# Altium PCB Copy of SensorBoard_PCB.PcbDoc (part 1 of 2)
Units mm, origin at the board's own origin, x right, y up, seen from the top; angles counter-clockwise.
Board outline 30.25 x 32.48 mm, 4 copper layers (Top Layer, GND, 3.3V, Bottom Layer), stack 0.603 mm thick; 41 components, 34 nets, 216 pads, 30 vias.
Unrouted connection lines stored in the file: 10.
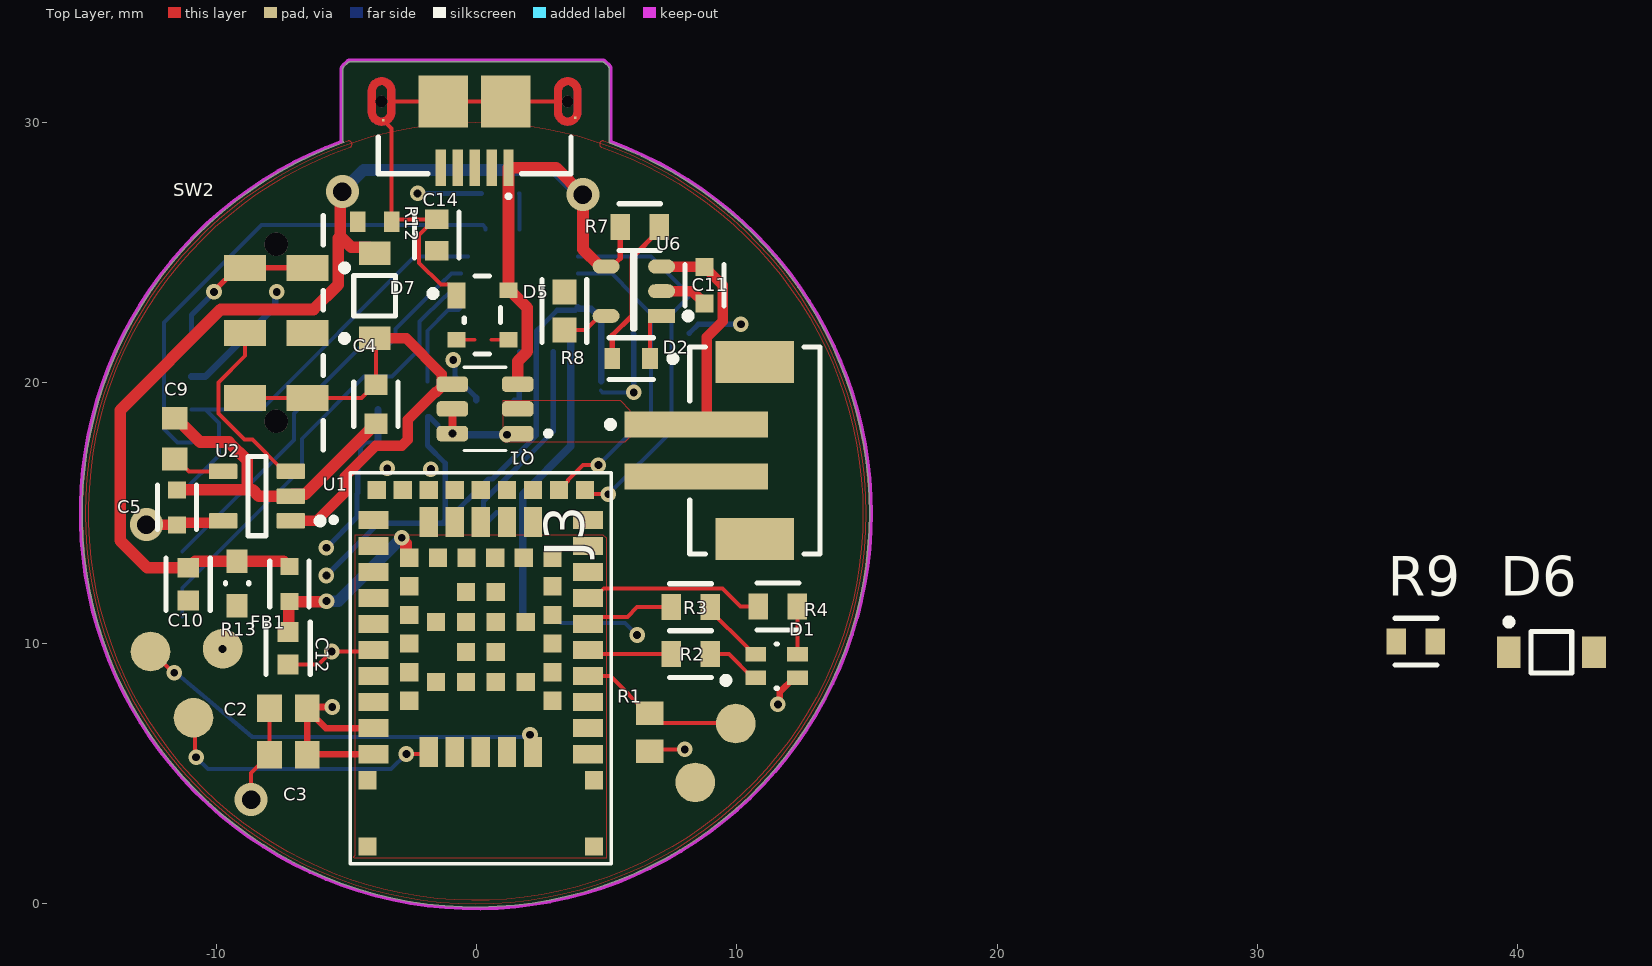
[diagram p0: Top Layer view]
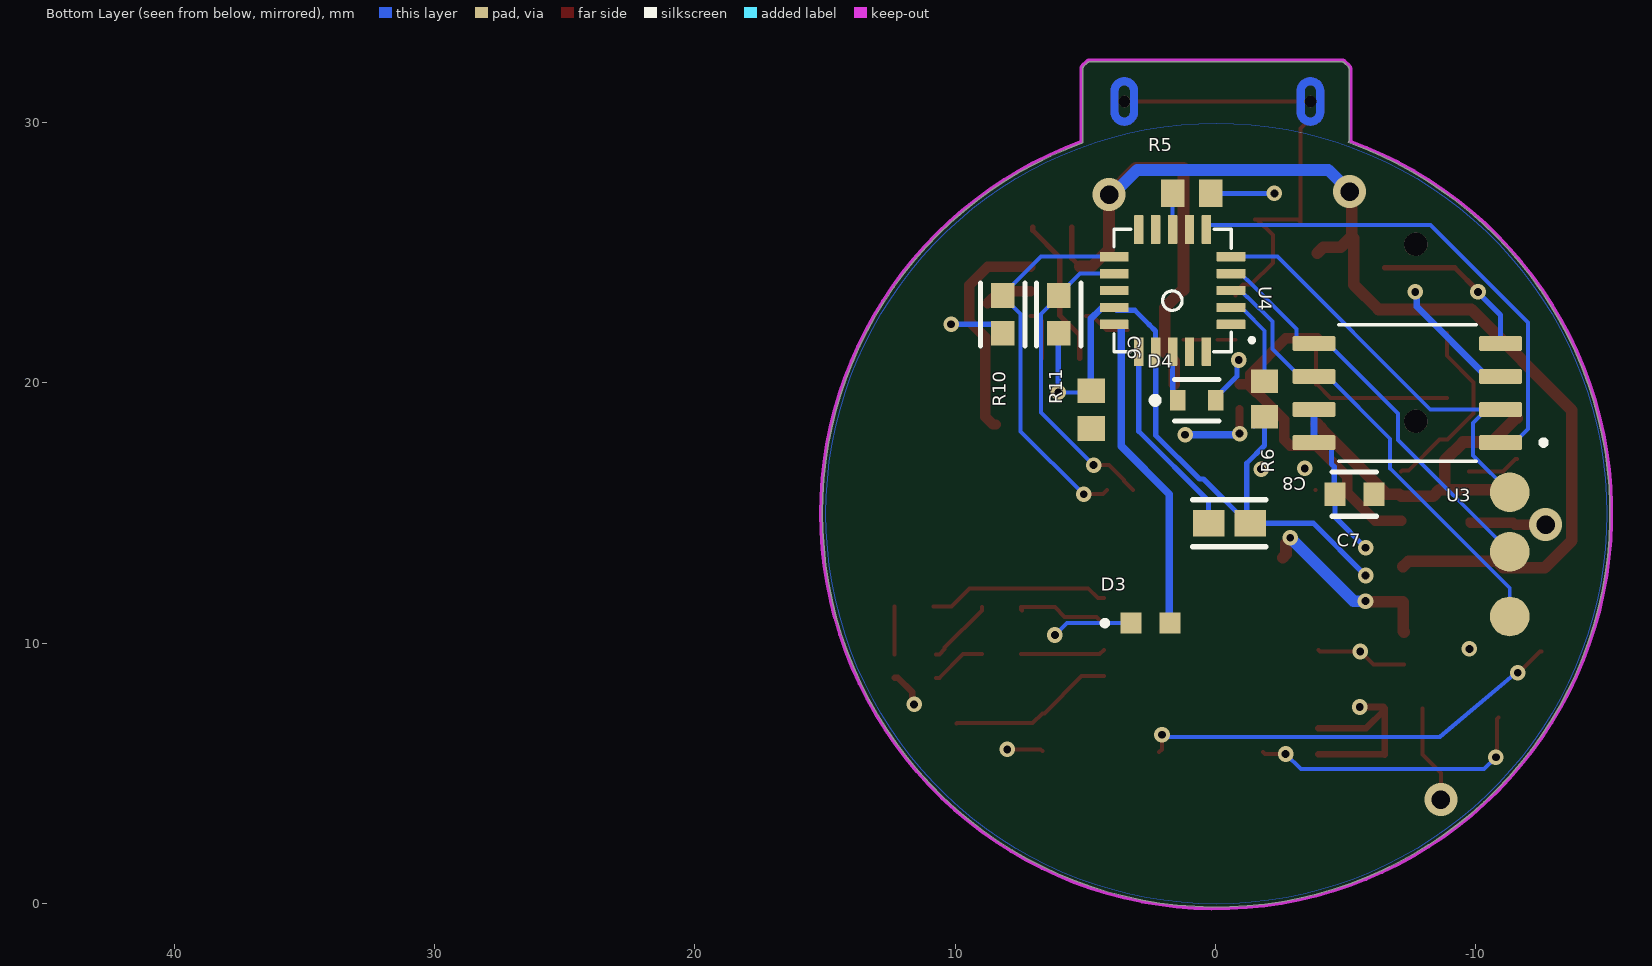
[diagram p1: Bottom Layer view, seen from below]
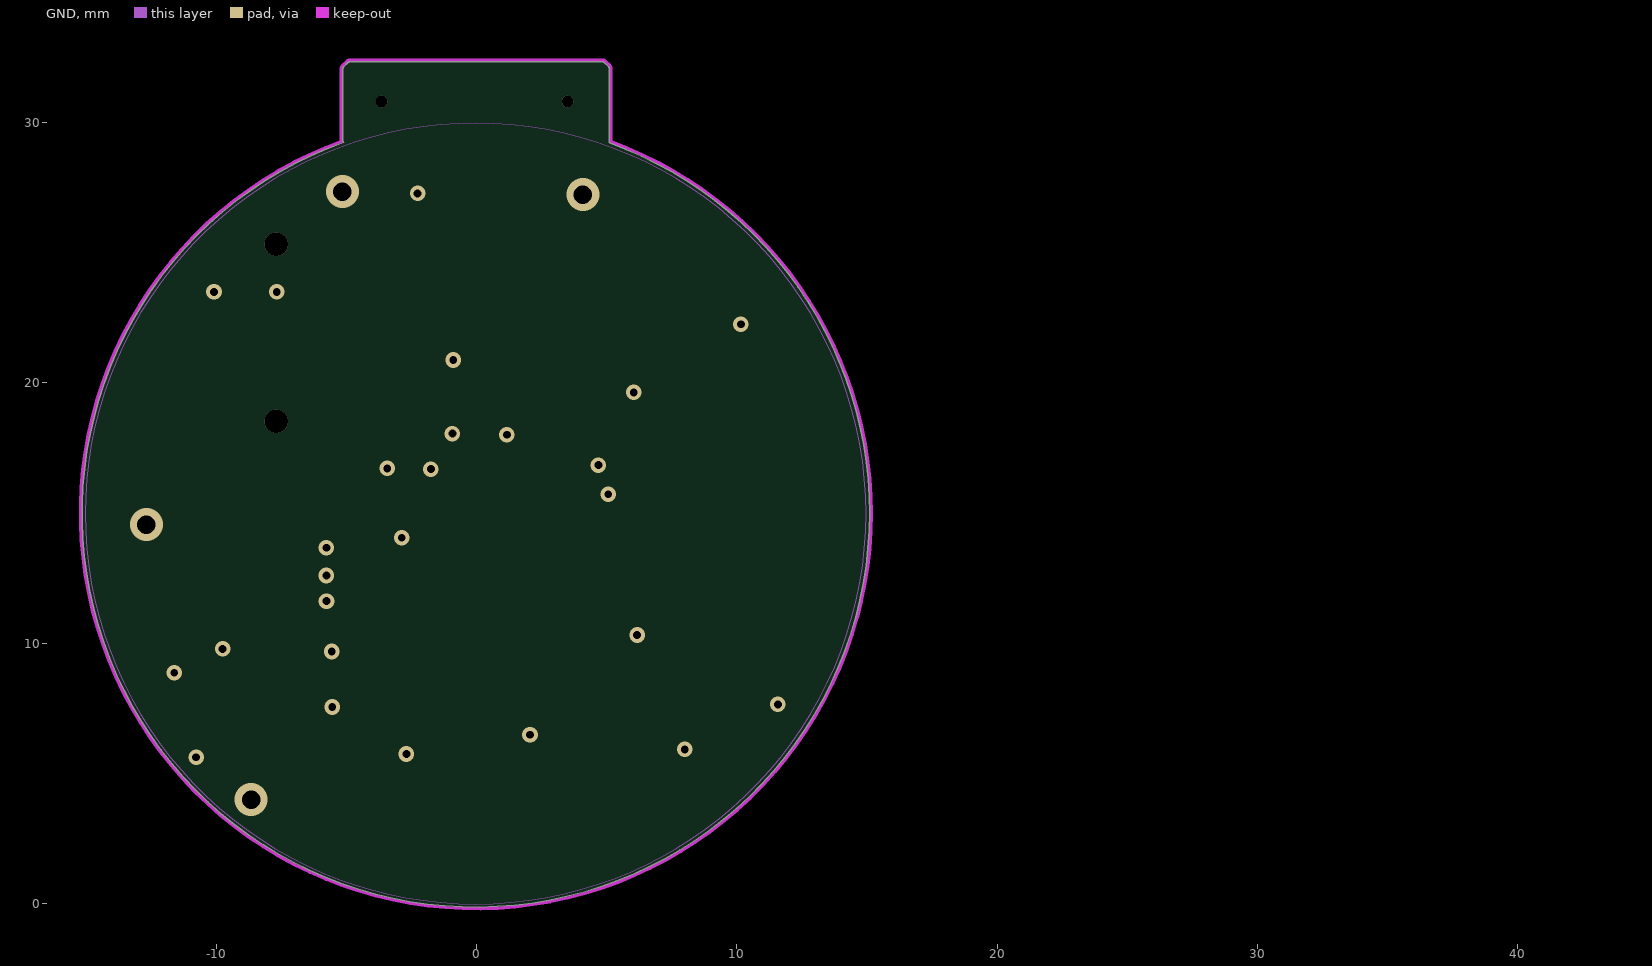
[diagram p2: GND]
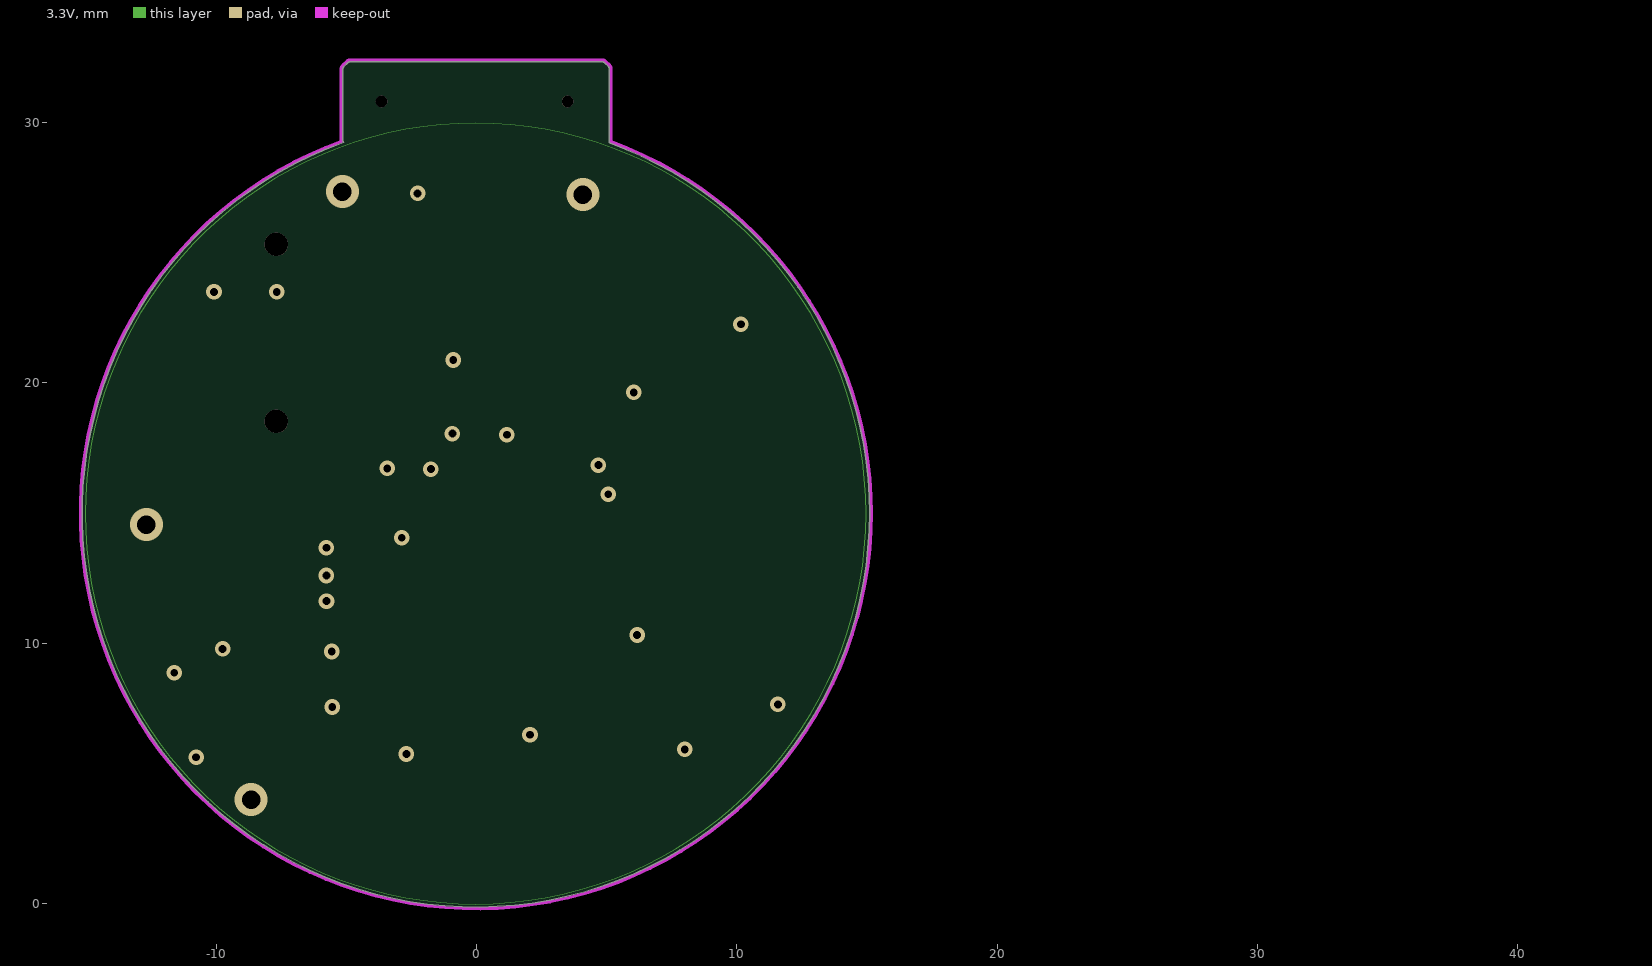
[diagram p3: 3.3V]

## Layer stack, top to bottom
Top Solder: solder mask 0.0102, Solder Resist, Dk 3.5
Top Layer: signal copper 0.0356
Dielectric 2: prepreg 0.0711, PP-006, Dk 4.1
GND: signal copper 0.035
Dielectric 1: dielectric 0.32, FR-4, Dk 4.8
3.3V: signal copper 0.035
Dielectric 3: prepreg 0.0711, PP-006, Dk 4.1
Bottom Layer: signal copper 0.0356
Bottom Solder: solder mask 0.0102, Solder Resist, Dk 3.5

## Board outline
-5.131,29.312 -5.131,32.058 cw(c-5.004,32.058) -5.093,32.149 -5.094,32.148 -4.945,32.297 -4.946,32.297 cw(c-4.855,32.207) -4.855,32.335 4.83,32.335 cw(c4.83,32.207) 4.92,32.297 5.068,32.148 5.068,32.149 cw(c4.978,32.058) 5.106,32.058 5.106,29.217 cw(c-0.025,14.986) 15.102,14.986 cw(c-0.025,14.986) -5.105,29.235 cw(c-5.004,29.312)

## Design rules (kind name [scope] priority, off if disabled: settings)
Clearance [All] p1: gap=0.15 ignorepadtopadclearanceinfootprint=FALSE except(0.28: Via-Via)
DiffPairsRouting [All] p1: maxlimit=0.254 minlimit=0.127 mostfreqgap=0.127 toplayer_minwidth=0.199 toplayer_maxwidth=0.199 toplayer_prefwidth=0.199 midlayer1_minwidth=0.199 midlayer1_maxwidth=0.199 midlayer1_prefwidth=0.199 midlayer2_minwidth=0.199 midlayer2_maxwidth=0.199 midlayer2_prefwidth=0.199 bottomlayer_minwidth=0.199 bottomlayer_maxwidth=0.199 bottomlayer_prefwidth=0.199 maxuncoupledlength=12.7
PolygonConnect [All] p1: connectstyle=Relief reliefconductorwidth=0.254 reliefentries=4 polygonreliefangle="90 Angle" airgapwidth=0.254
RoutingVias [All] p1: holewidth=0.3 width=1.27 viastyle="Through Hole" minholewidth=0.3 minwidth=0.6 maxholewidth=0.711 maxwidth=1.27
SolderMaskExpansion [All] p1: expansion=0.102 istentingtop=FALSE
Width [All] p1: maxlimit=0.6 minlimit=0.152 preferedwidth=0.152
29 further rules are at their usual default settings.

## Classes and differential pairs
differential pair USB: +USB_P -USB_N

## Components (designator, comment, footprint, x,y, rotation, side; value= is the part's Value field where it differs from the comment)
C2 "CL10B104KB8NNNC" SAMS-C0603-2_M -7.227,7.493 r0 top
C3 "CL10B104KB8NNNC" SAMS-C0603-2_M -7.227,5.715 r0 top
C4 "CC0603KRX7R7BB104" FP-CC0603-DA-MFG -3.861,19.177 r270 top value="100 nF"
C5 "GRM188R71A225KE15D" FP-GRM188-0_1-e0_2_0_5-MFG -11.506,15.215 r90 top
C6 "CL10B104KB8NNNC" SAMS-C0603-2_M 4.775,18.974 r270 bottom
C7 "CC0603KPX7R7BB105" FP-CC0603-DA-MFG -5.334,15.723 r180 bottom value="1 uF"
C8 "GRM188R60J106ME47D" FP-GRM188-0_1-e0_2_0_55-IPC_A -0.533,14.605 r180 bottom
C9 "C0603C103K3RACTU" RESC1608X55N -11.582,17.856 r270 top
C10 "GRM1885C1H102JA01D" FP-GRM188-0_1-e0_2_0_5-IPC_C -11.074,12.268 r270 top
C11 "C1608X5R0J106M080AB" FP-C1608-080-0_1-MFG 8.763,23.749 r90 top
C12 "GRM1885C1H102JA01D" FP-GRM188-0_1-e0_2_0_5-IPC_C -7.239,9.804 r270 top
C14 "C0603C472J5GACTU" FP-C0603C-CF-MFG -1.524,25.679 r270 top value="4,700 pF"
D1 "EAST1616RGBB2" FP-EAST1616RGBB2-MFG 11.532,9.119 r0 top
D2 "TLMO1000-GS08" FP-6_541-5056_01-4-MFG 5.944,20.93 r180 top
D3 "SIR19-21C/TR8" SIR19-21C/TR8 2.503,10.77 r180 bottom
D4 "TLMO1000-GS08" FP-6_541-5056_01-4-MFG 0.723,19.329 r180 bottom
D5 "PRTR5V0U2X,215" FP-SOT143B-MFG 0.229,22.606 r0 top
D6 "MBR0540T1G" ONSC-SOD-123-2-425-04_V 41.3,9.652 r0 top
D7 "MBR0540T1G" ONSC-SOD-123-2-425-04_V -3.912,23.343 r90 top
FB1 "BLM18EG101TN1D" FP-BLM18-0_15-t0_5-MFG -7.188,12.268 r270 top
J3 "B2B-PH-SM4-TB(LF)(SN)" JST-B2B-PH-SM4-TB-2_V 10.693,17.399 r90 top
Q1 "TSM3443CX6RFG" SOT95P280X145-6N 0.33,18.999 r180 top
R1 "ERJ-3EKF3242V" RESC1608X55X30ML15T15 6.655,6.579 r270 top
R2 "CRCW0603330RFKEA" FP-CRCW0603-e3-MFG 8.23,9.576 r180 top
R3 "CRCW0603330RFKEA" FP-CRCW0603-e3-MFG 8.23,11.379 r180 top
R4 "CRCW0603330RFKEA" FP-CRCW0603-e3-MFG 11.582,11.405 r180 top
R5 "ERJ-3EKF3242V" RESC1608X55X30ML15T15 0.914,27.28 r180 bottom
R6 "CRCW060310K0FKTB" RESC1609X50X30ML10T20 -1.88,19.38 r90 bottom
R7 "CRCW06031K00FKEA" FP-CRCW0603-e3-MFG 6.274,25.984 r180 top
R8 "CR0603-FX-4701ELF" FP-CR0603-IPC_B 3.378,22.758 r270 top
R9 "CRCW06030000Z0EAHP" FP-CRCW0603-HPe3-MFG 36.093,10.058 r0 top
R10 "CR0603-FX-4701ELF" FP-CR0603-IPC_B 8.179,22.631 r270 bottom
R11 "CR0603-FX-4701ELF" FP-CR0603-IPC_B 6.02,22.631 r270 bottom
R12 "RC0603FR-071ML" RESC1608X55X25LL10T15 -3.912,26.187 r0 top
R13 "RC0603FR-07100KL" FP-RC0603-0_55-MFG -9.195,12.294 r90 top
SW2 "JS102011JAQN" FP-JS102011JAQN-MFG -7.69,21.92 r270 top
U1 "NINA-B306-00B-00" XCVR_NINA-B306-00B-00 0.169,9.034 r0 top
U2 "TPS73033DBVR" FP-DBV0005A-MFG -8.433,15.646 r180 top
U3 "AT25SF041B-SHB-T" SOIC127P790X216-8N -7.366,19.609 r0 bottom
U4 "AS7263-BLGT" AS7263Footprint 1.651,23.546 r0 bottom
U6 "MCP73831T-2ATI/OT" FP-C04-091-OT-IPC_C 6.045,23.52 r180 top

## Footprints (in the part's own frame and the unit in brackets; to place one, negate y for a bottom-side part, rotate by r counter-clockwise, add the part's x,y. Pads: shape width x height; smd on the part's side, far side on the other; paste and mask are expansions set on the pad)
AS7263Footprint [mm]
  rrect9% 1.1x0.36 smd: 1(-2.245,1.3) 2(-2.245,0.65) 3(-2.245,0) 4(-2.245,-0.65) 5(-2.245,-1.3) 11(2.245,-1.3) 12(2.245,-0.65) 13(2.245,0) 14(2.245,0.65) 15(2.245,1.3)
  rrect9% 0.36x1.1 smd: 6(-1.3,-2.345) 7(-0.65,-2.345) 8(0,-2.345) 9(0.65,-2.345) 10(1.3,-2.345) 16(1.3,2.345) 17(0.65,2.345) 18(0,2.345) 19(-0.65,2.345) 20(-1.3,2.345)
  silkscreen extent -3.12,-2.35 2.25,2.35
FP-6_541-5056_01-4-MFG [mm]
  rect 0.6x0.8 smd paste+0 mask+0: 1(-0.725,0) 2(0.725,0)
  silkscreen extent -1.73,-0.8 0.85,0.8, body extent -1.12,-0.55 1.12,0.55, height 0.25
FP-BLM18-0_15-t0_5-MFG [mm]
  rect 0.65x0.7 smd paste+0 mask+0: 1(-0.675,0) 2(0.675,0)
  silkscreen extent -0.87,-0.75 0.87,0.75, body extent -1.1,-0.58 1.1,0.58, height 0.25
FP-C04-091-OT-IPC_C [mm]
  rect 1.038x0.538 smd paste+0 mask+0: 1(-1.066,0.95)
  rrect100% 1.038x0.538 smd paste+0 mask+0: 2(-1.066,0) 3(-1.066,-0.95) 4(1.066,-0.95) 5(1.066,0.95)
  silkscreen extent -2.21,-1.45 0.05,1.45
FP-C0603C-CF-MFG [mm]
  rect 0.75x0.9 smd paste+0 mask+0: 1(-0.6,0) 2(0.6,0)
  silkscreen extent -0.87,-0.85 0.88,0.85, body extent -1.2,-0.6 1.2,0.6, height 0.25
FP-C1608-080-0_1-MFG [mm]
  rect 0.7x0.7 smd paste+0 mask+0: 1(-0.7,0) 2(0.7,0)
  silkscreen extent -0.8,-0.75 0.8,0.75, body extent -1.15,-0.55 1.15,0.55, height 0.25
FP-CC0603-DA-MFG [mm]
  rect 0.8x0.9 smd paste+0 mask+0: 1(-0.75,0) 2(0.75,0)
  silkscreen extent -0.85,-0.85 0.85,0.85, body extent -1.35,-0.75 1.35,0.75, height 0.25
FP-CR0603-IPC_B [mm]
  rect 0.958x0.912 smd paste+0 mask+0: 1(-0.727,0) 2(0.727,0)
  silkscreen extent -1.21,-0.86 1.21,0.86, body extent -1.46,-0.71 1.46,0.71, height 0.25
FP-CRCW0603-e3-MFG [mm]
  rect 0.75x1 smd paste+0 mask+0: 1(-0.75,0) 2(0.75,0)
  silkscreen extent -0.8,-0.9 0.8,0.9, body extent -0.77,-0.42 0.77,0.43, height 0.5
FP-CRCW0603-HPe3-MFG [mm]
  rect 0.75x1 smd paste+0 mask+0: 1(-0.75,0) 2(0.75,0)
  silkscreen extent -0.8,-0.9 0.8,0.9, body extent -1.22,-0.6 1.22,0.6, height 0.25
FP-DBV0005A-MFG [mm]
  rrect17% 1.1x0.6 smd paste+0 mask+0: 1(-1.3,0.95) 2(-1.3,0) 3(-1.3,-0.95) 4(1.3,-0.95) 5(1.3,0.95)
  silkscreen extent -2.55,-1.53 0.35,1.53, body extent -1.95,-1.78 1.95,1.78, height 0.25
FP-EAST1616RGBB2-MFG [mm]
  rect 0.8x0.55 smd paste+0 mask+0: 1(-0.8,-0.45) 2(-0.8,0.45) 3(0.8,0.45) 4(0.8,-0.45)
  silkscreen extent -2.07,-0.85 0.03,0.85, body extent -1.3,-0.95 1.3,0.95, height 0.25
FP-GRM188-0_1-e0_2_0_5-IPC_C [mm]
  rect 0.759x0.812 smd paste+0 mask+0: 1(-0.627,0) 2(0.627,0)
  silkscreen extent -1.01,-0.85 1.01,0.85, body extent -1.11,-0.55 1.11,0.55, height 0.25
FP-GRM188-0_1-e0_2_0_5-MFG [mm]
  rect 0.65x0.7 smd paste+0 mask+0: 1(-0.675,0) 2(0.675,0)
  silkscreen extent -0.85,-0.75 0.85,0.75, body extent -1.1,-0.55 1.1,0.55, height 0.25
FP-GRM188-0_1-e0_2_0_55-IPC_A [mm]
  rect 1.208x1.012 smd paste+0 mask+0: 1(-0.802,0) 2(0.802,0)
  silkscreen extent -1.41,-0.91 1.41,0.91, body extent -0.8,-0.4 0.8,0.4, height 0.9
FP-JS102011JAQN-MFG [mm]
  rect 1x1.6 smd paste+0 mask+0: 1(-2.5,1.2) 1(-2.5,-1.2) 2(0,1.2) 2(0,-1.2) 3(2.5,1.2) 3(2.5,-1.2)
  round 0.9 hole 0.9 unplated paste-1000 mask+0: ""(-3.4,0) ""(3.4,0)
  silkscreen extent -4.5,1.8 4.5,2.75, body extent -4.6,-3.9 4.6,2.1, height 0.25
FP-RC0603-0_55-MFG [mm]
  rect 0.9x0.8 smd paste+0 mask+0: 1(-0.85,0) 2(0.85,0)
  silkscreen extent -0.03,-0.45 0.03,0.45, body extent -1.4,-0.55 1.4,0.55, height 0.25
FP-SOT143B-MFG [mm]
  rect 0.7x1 smd paste-1000 mask+0: 1(-1,0.75)
  rect 0.7x0.6 smd paste-1000 mask+0: 2(-1,-0.95) 3(1,-0.95) 4(1,0.95)
  silkscreen extent -2.02,-1.5 0.7,1.5, body extent -1.5,-1.63 1.5,1.63, height 0.25
JST-B2B-PH-SM4-TB-2_V [mm] "SMD, 2-Leads, Body 7.95x5mm, Pitch 2mm"
  rect 1x5.5 smd: 1(1,2.25) 2(-1,2.25)
  rect 1.6x3 smd: MP1(3.4,0) MP2(-3.4,0)
  silkscreen extent -3.98,-2.5 3.98,5.67, body extent -3.97,-2.5 3.97,4.5, height 6.6
ONSC-SOD-123-2-425-04_V [mm] "SOD, 2-Leads, Body 2.69x1.6mm"
  rect 0.91x1.22 smd: 1(-1.635,0) 2(1.635,0)
  silkscreen extent -1.76,-0.8 0.78,1.28, body extent -1.35,-0.8 1.35,0.8, height 1.35
RESC1608X55N [mm]
  rect 0.87x0.98 smd: 1(-0.78,0) 2(0.78,0)
RESC1608X55X25LL10T15 [mm] "Chip Resistor, 2-Leads, Body 1.70x0.90mm, IPC High Density"
  rect 0.6x0.8 smd: 1(-0.65,0) 2(0.65,0)
  body extent -0.85,-0.45 0.85,0.45, height 0.55
RESC1608X55X30ML15T15 [mm] "Chip Resistor, 2-Leads, Body 1.60x0.80mm, IPC Low Density"
  rect 0.9x1.05 smd: 1(-0.725,0) 2(0.725,0)
  body extent -0.87,-0.48 0.87,0.48, height 0.55
RESC1609X50X30ML10T20 [mm] "Chip Resistor, 2-Leads, Body 1.55x0.85mm, IPC Low Density"
  rect 0.9x1.05 smd: 1(-0.675,0) 2(0.675,0)
  body extent -0.82,-0.48 0.82,0.48, height 0.5
SAMS-C0603-2_M [mm] "Chip Capacitor, 2-Leads, Body 1.70x0.90mm, IPC Low Density"
  rect 0.95x1.05 smd: 1(-0.725,0) 2(0.725,0)
  body extent -0.85,-0.45 0.85,0.45, height 0.9
SIR19-21C/TR8 [mm]
  rect 0.8x0.8 smd: 1(-0.75,0) 2(0.75,0)
  silkscreen extent -1.85,-0.1 -1.65,0.1
SOIC127P790X216-8N [mm]
  rrect25% 1.65x0.58 smd: 1(-3.585,1.905) 2(-3.585,0.635) 3(-3.585,-0.635) 4(-3.585,-1.905) 5(3.585,-1.905) 6(3.585,-0.635) 7(3.585,0.635) 8(3.585,1.905)
  silkscreen extent -5.33,-2.62 2.65,2.62, body extent -3.99,-2.62 3.99,2.62, height 2.16
SOT95P280X145-6N [mm]
  rrect50% 1.21x0.59 smd: 1(-1.255,0.95) 2(-1.255,0) 3(-1.255,-0.95) 4(1.255,-0.95) 5(1.255,0) 6(1.255,0.95)
  silkscreen extent -2.53,-1.6 0.8,1.6, body extent -1.4,-1.46 1.4,1.46, height 1.5
XCVR_NINA-B306-00B-00 [mm]
  rect 1.15x0.7 smd: 1(-4.125,5.7) 2(-4.125,4.7) 3(-4.125,3.7) 4(-4.125,2.7) 5(-4.125,1.7) 6(-4.125,0.7) 7(-4.125,-0.3) 8(-4.125,-1.3) 9(-4.125,-2.3) 10(-4.125,-3.3) 16(4.125,-3.3) 17(4.125,-2.3) 18(4.125,-1.3) 19(4.125,-0.3) 20(4.125,0.7) 21(4.125,1.7) 22(4.125,2.7) 23(4.125,3.7) 24(4.125,4.7) 25(4.125,5.7)
  rect 0.7x1.15 smd: 11(-2,-3.225) 12(-1,-3.225) 13(0,-3.225) 14(1,-3.225) 15(2,-3.225) 26(2,5.625) 27(1,5.625) 28(0,5.625) 29(-1,5.625) 30(-2,5.625)
  rect 0.7x0.7 smd: 31(-2.75,4.25) 32(-2.75,3.15) 33(-2.75,2.05) 34(-2.75,0.95) 35(-2.75,-0.15) 36(-2.75,-1.25) 37(2.75,-1.25) 38(2.75,-0.15) 39(2.75,0.95) 40(2.75,2.05) 41(2.75,3.15) 42(2.75,4.25) 43(1.65,4.25) 44(0.55,4.25) 45(-0.55,4.25) 46(-1.65,4.25) 47(4,6.85) 48(3,6.85) 49(2,6.85) 50(1,6.85) 51(0,6.85) 52(-1,6.85) 53(-2,6.85) 54(-3,6.85) 55(-4,6.85) EAGP1(-4.35,-4.3) EAGP2(4.35,-4.3) EAGP3(-4.35,-6.85) EAGP4(4.35,-6.85) EGP1(-0.575,2.925) EGP2(0.575,2.925) EGP3(-1.725,1.775) EGP4(-0.575,1.775) EGP5(0.575,1.775) EGP6(1.725,1.775) EGP7(-0.575,0.625) EGP8(0.575,0.625) EGP9(-1.725,-0.525) EGP10(-0.575,-0.525) EGP11(0.575,-0.525) EGP12(1.725,-0.525)
  silkscreen extent -5.75,-7.51 5.01,7.51, body extent -5,-7.5 5,7.5, height 2.63

## Part data
C2 C3 C6: library part CMP-2000-05332-1, "Multi-layer Ceramic Capacitor, -55 to 125 degC, 2-Pin SMD (0603), RoHS, Tape and Reel", Capacitance=0.1µF, Case Size/Dimension=0603, Dielectric=X7R, Manufacturer="Samsung Electro-Mechanics", Rated Voltage=50V, Tolerance (%)=±10%, Datasheet URL=https://datasheet.ciiva.com/29198/456651-da-01-en-vs-kondensator-0605-29198839.pdf, Datasheet Version=Nov-10, Manufacturer URL=http://www.samsungsem.com/global/index.jsp
C4: library part CMP-2000-05002-2, "CAP CER 0.1UF 16V X7R 0603", Capacitance="100 nF", Manufacturer=YAGEO, Package=CC0603-DA, Temperature="-55°C to +125°C", Temperature Characteristic=X7R, Temperature Coefficient=15%, Temperature Range High=+125°C, Temperature Range Low=-55°C, Tolerance=0.1, Voltage="16 V", Automotive=No, Category=Cap, ComponentLink2Description=Datasheet, ComponentLink2URL=http://www.yageo.com/documents/recent/UPY-GPHC_X7R_6.3V-to-50V_18.pdf, Device Class L1="Passive Components", Device Class L2=Capacitors, Device Class L3="Ceramic Capacitors", Digikey Description="CAP CER 0.1UF 16V X7R 0603", Footprint Url=http://www.yageo.com/exep/pages/download/literatures/UPY-C_GEN_24.pdf, Height=0.9mm, Lead Free=Yes, Manufacturer Part Number=CC0603KRX7R7BB104, Material=Ceramic, Mouser Description="Multilayer Ceramic Capacitor, CC Series, 0.1 - F, - 10%, X7R, 16 V, 0603 [1608 Metric]", Octopart=https://octopart.com/cc0603krx7r7bb104-yageo-192941, RoHS=TRUE, Voltage Rating="16 V"
C5: library part CMP-2006-02836-2, "Chip Multilayer Ceramic Capacitors for General Purpose, 0603, 2.2uF, X7R, 15%, 10%, 10V", Capacitance=2.2uF, Case Code (Imperial)=0603, Case Code (Metric)=1608, Dielectric=X7R, Max Operating Temperature=125°C, Min Operating Temperature=-55°C, Package Quantity=1, Tolerance=10%, Voltage=10V, Case/Package=0603, Depth=0.8mm, Height=0.8mm, Lead Free="Lead Free", Length=1.6mm, Material=Ceramic, Mount="Surface Mount", Number of Pins=2, Packaging="Cut Tape", REACH SVHC="No SVHC", Termination=SMD/SMT, Thickness=0.035inch, Voltage Rating=10V, Voltage Rating (DC)=10V, Weight=7.1E-05oz, Width=0.031inch
C7: library part CMP-03422-001047-1, "CC0603 1 uF X7R 10.00% 16 V", Capacitance="1 uF", Manufacturer=YAGEO, Package=CC0603-DA, Temperature="-55°C to +125°C", Temperature Characteristic=X7R, Temperature Coefficient=15%, Temperature Range High=+125°C, Temperature Range Low=-55°C, Tolerance=0.1, Voltage="16 V", Automotive=No, Category=Cap, ComponentLink2Description=Datasheet, ComponentLink2URL=http://www.yageo.com/documents/recent/UPY-GPHC_X7R_6.3V-to-50V_18.pdf, Device Class L1="Passive Components", Device Class L2=Capacitors, Device Class L3="Ceramic Capacitors", Footprint Url=http://www.yageo.com/exep/pages/download/literatures/UPY-C_GEN_24.pdf, Height=0.9mm, Lead Free=Yes, Manufacturer Part Number=CC0603KPX7R7BB105, Material=Ceramic, Mouser Description="Cap Ceramic 1uF 16V X7R 10% SMD 0603 125°C Paper T/R", Octopart=https://octopart.com/cc0603kpx7r7bb105-yageo-25629533, RoHS=TRUE, Voltage Rating="16 V"
C8: library part CMP-2006-02792-2, "Chip Multilayer Ceramic Capacitors for General Purpose, 0603, 10uF, X5R, 15%, 20%, 6.3V", Capacitance=10uF, Case Code (Imperial)=0603, Case Code (Metric)=1608, Dielectric=X5R, Max Operating Temperature=85°C, Min Operating Temperature=-55°C, Package Quantity=4000, Tolerance=20%, Voltage=6.3V, Case/Package=0603, Depth=0.8mm, Height=0.8mm, Lead Free="Lead Free", Length=1.6mm, Material=Ceramic, Mount="Surface Mount", Packaging="Tape and Reel", Radiation Hardening=No, REACH SVHC="No SVHC", Termination=SMD/SMT, Thickness=0.035inch, Voltage Rating=6.3V, Voltage Rating (DC)=6.3V, Width=0.031inch
C9: Capacitance=0.01uF, Supplier Part Number 1=399-C0603C103K3RAC7867CT-ND, Supplier 1=Digi-Key
C10 C12: library part CMP-1662-00022-2, "Chip Multilayer Ceramic Capacitors for General Purpose, 0603, 1000pF, C0G, 30ppm/°C, 5%, 50V", Capacitance=1nF, Case Code (Imperial)=0603, Case Code (Metric)=1608, Dielectric=C0G, Dielectric Material=Ceramic, Insulation Resistance=10GR, Max Operating Temperature=125°C, Min Operating Temperature=-55°C, Package Quantity=1, Temperature Coefficient=30ppm/°C, Tolerance=5%, Voltage=50V, Case/Package=0603, Depth=0.8mm, Height=0.8mm, Lead Free="Lead Free", Length=1.6mm, Material=Ceramic, Mount="Surface Mount", Number of Pins=2, Packaging="Tape and Reel", Radiation Hardening=No, REACH SVHC="No SVHC", Termination=SMD/SMT, Thickness=0.035inch, Voltage Rating=50V, Voltage Rating (DC)=50V, Width=0.8mm
C11: library part CMP-2000-04978-2, "Multilayer Ceramic Capacitors 10μF ±20% 6.3V X5R SMD 0603", Capacitance=10uF, Case Code (Imperial)=0603, Case Code (Metric)=1608, Dielectric=X5R, Dielectric Material=Ceramic, Max Operating Temperature=85°C, Min Operating Temperature=-55°C, Package Quantity=1, Tolerance=20%, Voltage=6.3V, Case/Package=0603, Construction=Flat, Depth=0.8mm, Height=0.8mm, Lead Free="Lead Free", Length=1.6mm, Mount="Surface Mount", Packaging="Tape and Reel", Radiation Hardening=No, REACH SVHC="No SVHC", Resistor Type=Ceramic, RoHS Compliant=Yes, Series=C, Termination=SMD/SMT, Thickness=0.035inch, Voltage Rating=6.3V, Voltage Rating (DC)=6.3V, Weight=7.1E-05oz, Width=0.031inch
C14: library part CMP-2006-03333-2, "CAP CER 4700PF 50V 5% NP0 0603", Capacitance="4,700 pF", Manufacturer=KEMET, Package=C0603C-CF, Temperature="-55°C to +125°C", Temperature Characteristic=C0G, Temperature Coefficient=30ppm/°C, Temperature Range High=+125°C, Temperature Range Low=-55°C, Tolerance=0.05, Voltage Rating="50 V", Automotive=Yes, Automotive Grade="Grade 1", Category=Cap, ComponentLink2Description=Datasheet, ComponentLink2URL=https://api.kemet.com/component-edge/download/datasheet/C0603C100J5GACAUTO.pdf, Device Class L1="Passive Components", Device Class L2=Capacitors, Device Class L3="Ceramic Capacitors", Digikey Description="CAP CER 4700PF 50V 5% NP0 0603", Height=0.87mm, Lead Free=Yes, Manufacturer Part Number=C0603C472J5GACTU, Material=Ceramic, Mouser Description="Multilayer Ceramic Capacitors MLCC - SMD/SMT 50volts 4700pF 5% C0G", Octopart=https://octopart.com/c0603c472j5gactu-kemet-9145067, RoHS=TRUE
D1: library part CMP-51564-000002-1, "LED RGB DIFFUSED 4SMD", Colour="Blue, Green, Red", Forward Current=5mA, Forward Voltage=3/3/2.1V, Manufacturer=Everlight, Package=0, Power Dissipation=95/95/60mW, Reverse Voltage=5V, Temperature="-40°C to +85°C", Temperature Range High=+85°C, Temperature Range Low=-40°C, Automotive=No, Category=Diode, ComponentLink2Description=Datasheet, ComponentLink2URL=https://everlightamericas.com/index.php?controller=attachment&id_attachment=2426, Device Class L1=Optoelectronics, Device Class L2=LEDs, Device Class L3=unset, Digikey Description="LED RGB DIFFUSED 4SMD", Height=0.45mm, Lead Free=Yes, Led Orientation="Top View", Luminous Intensity=36/140/45mcd, Manufacturer Part Number=EAST1616RGBB2, Octopart=https://octopart.com/east1616rgbb2-everlight-80328051, Peak Emmision Wavelength=468/518/632nm, RoHS=TRUE, Viewing Angle=120°, Wavelength=475/535/628nm
D2 D4: library part CMP-02520-000010-1, "LED ORANGE 0603 SMD", Ambient Temperature Range High=+100°C, Ambient Temperature Range Low=-40°C, Colour=Orange, Forward Current=2mA, Forward Voltage=1.8V, Manufacturer=Vishay, Max Junction Temp=+120°C, Package=6.541-5056.01-4, Power Dissipation=40mW, Reverse Voltage=6V, Temperature="-40°C to +100°C", Automotive=Yes, Automotive Grade="Grade 2", Category=Diode, ComponentLink2Description=Datasheet, ComponentLink2URL=http://www.vishay.com/docs/83172/tlmo1000.pdf, Device Class L1=Optoelectronics, Device Class L2=LEDs, Device Class L3=unset, Digikey Description="LED ORANGE 0603 SMD", Height=0.65mm, Lead Free=Yes, Led Orientation="Top View", Luminous Intensity=7.5mcd, Manufacturer Part Number=TLMO1000-GS08, Octopart=https://octopart.com/tlmo1000-gs08-vishay-41955669, Peak Emmision Wavelength=610nm, RoHS=TRUE, Temperature Range High=+100°C, Temperature Range Low=-40°C, Viewing Angle=160°, Wavelength=605nm
D5: library part CMP-14436-000007-1, "TVS DIODE 5.5V SOT143B"
D6 D7: library part CMP-1055-00401-1, "Schottky Power Rectifier, 2-Pin SOD-123, Pb-Free, Tape and Reel", Manufacturer="On Semiconductor", ComponentLink1Description="Manufacturer URL", ComponentLink1URL=http://www.onsemi.com/, ComponentLink2Description=Datasheet, ComponentLink2URL=http://www.onsemi.cn/pub_link/Collateral/MBR0540T1-D.PDF, ComponentLink3Description="Package Specification", ComponentLink3URL=http://www.onsemi.com/pub_link/Collateral/425-04.PDF, Configuration=Single, DatasheetVersion="Rev. 7", IFSM Max (A)=5.5, Mounting Technology="Surface Mount", PackageDescription="2-Pin SOD, Body 1.6 x 2.69 mm", PackageReference=SOD-123-2-425-04, PackageVersion="Rev. G, 10/2009", Packing="Tape and Reel", PartNumber=MBR0540T1G, RoHS=TRUE
FB1: library part CMP-0686-00530-3, "Chip Ferrite Bead, 0603, 100Ω @ 100MHz, 25%, 0.045Ω, 2A", Case Code (Imperial)=0603, Case Code (Metric)=1608, Current Rating=2A, DC Resistance (DCR)=45mR, Max Operating Temperature=125°C, Min Operating Temperature=-55°C, Package Quantity=1, Test Frequency=100MHz, Tolerance=25%, Case/Package=0603, Contact Plating=Tin, Core Material=Ferrite, Depth=0.8mm, Height=0.8mm, Impedance=100R, Lead Free="Lead Free", Length=1.6mm, Material=Ferrite, Max Current Rating=2A, Max DC Current=2A, Number of Circuits=1, Number of Lines=1, Number of Pins=2, Packaging="Tape and Reel", REACH SVHC="No SVHC", Termination=SMD/SMT, Width=0.8mm
J3: library part CMP-2000-05163-1, "Male Header, Pitch 2 mm, 1 x 2 Position, Height 6.6 mm, RoHS, Tape and Reel", Manufacturer=JST, Datasheet URL=https://ciiva.com/datasheet-click-26894756?src=ciiva&sig=90099765, Datasheet Version=Dec-12, Manufacturer URL=http://www.jst.com/home2.html, No of Positions=2, Pitch=2mm, Style/Orientation=StraightHeader/Plug, Termination=Crimp, Type=ShroudedHeader
Q1: Supplier Part Number 1=TSM3443CX6RFGCT-ND, Supplier 1=Digi-Key
R1 R5: library part CMP-2000-00433-1, Manufacturer=Panasonic, Part Number=ERJ-3EKF3242V
R2 R3 R4: library part CMP-1012-00454-3, "RES Thick Film, 330Ω, 1%, 0.1W, 100ppm/°C, 0603", Case Code (Imperial)=0603, Case Code (Metric)=1608, Max Operating Temperature=155°C, Max Power Dissipation=100mW, Min Operating Temperature=-55°C, Package Quantity=10, Resistance=330R, Temperature Coefficient=100ppm/°C, Tolerance=1%, Voltage Rating=75V, Case/Package=0603, Composition="Thick Film", Contact Plating=Tin, Depth=0.85mm, Features="Automotive AEC-Q200", Height=0.45mm, Lead Free="Lead Free", Length=1.55mm, Military Standard=Not, Mount="Surface Mount", Number of Terminations=2, Packaging="Tape and Reel", Power Rating=100mW, Radiation Hardening=No, Termination=SMD/SMT, Voltage Rating (DC)=75V, Weight=7.1E-05oz, Width=0.033inch
R6: library part CMP-2000-03837-1, Manufacturer="Vishay Dale", Part Number=CRCW060310K0FKTB
R7: library part CMP-1666-00003-5, "RES Thick Film, 1kΩ, 1%, 0.1W, 100ppm/°C, 0603", Case Code (Imperial)=0603, Case Code (Metric)=1608, Max Operating Temperature=155°C, Max Power Dissipation=100mW, Min Operating Temperature=-55°C, Package Quantity=10, Resistance=1kR, Temperature Coefficient=100ppm/°C, Tolerance=1%, Voltage Rating=75V, Case/Package=0603, Composition="Thick Film", Contact Plating=Tin, Depth=0.85mm, Features="Automotive AEC-Q200", Height=0.45mm, Lead Free="Lead Free", Length=1.55mm, Military Standard=Not, Mount="Surface Mount", Number of Pins=2, Number of Terminations=2, Packaging="Tape and Reel", Power Rating=100mW, Radiation Hardening=No, Termination=SMD/SMT, Voltage Rating (DC)=75V, Weight=7.1E-05oz, Width=0.033inch
R8 R10 R11: library part CMP-07231-003020-1, "Thick Film Chip Resistors 0603 4.7kΩ 0.1W 1% 100ppm/°C", Case Code (Imperial)=0603, Case Code (Metric)=1608, Max Operating Temperature=155°C, Max Power Dissipation=100mW, Min Operating Temperature=-55°C, Package Quantity=1, Resistance=4.7kR, Temperature Coefficient=100ppm/°C, Tolerance=1%, Voltage Rating=50V, Case/Package=0603, Composition="Thick Film", Contact Plating=Tin, Depth=0.8mm, Features="Moisture Resistant", Height=0.45mm, Length=1.6mm, Mount="Surface Mount", Number of Pins=2, Number of Terminations=2, Packaging="Tape and Reel", Power Rating=100mW, Radiation Hardening=No, REACH SVHC="No SVHC", Termination=SMD/SMT, Thickness=457um, Voltage Rating (DC)=50V, Width=0.8mm
R9: library part CMP-2000-03817-2, "RES Thick Film, 0Ω, , 0.33W, , 0603", Case Code (Imperial)=0603, Case Code (Metric)=1608, Max Operating Temperature=155°C, Max Power Dissipation=250mW, Min Operating Temperature=-55°C, Package Quantity=5000, Resistance=0mR, Temperature Coefficient=0ppm/°C, Voltage Rating=75V, Case/Package=0603, Composition="Thick Film", Contact Plating=Tin, Depth=0.85mm, Features="Automotive AEC-Q200", Height=0.45mm, Lead Free="Lead Free", Length=1.6mm, Military Standard=Not, Mount="Surface Mount", Number of Pins=2, Number of Terminations=2, Packaging="Tape and Reel", Power Rating=250mW, Radiation Hardening=No, Termination=SMD/SMT, Voltage Rating (DC)=75V, Weight=7.1E-05oz, Width=0.033inch
R12: library part CMP-1659-00056-1, "Chip Resistor, 1 MOhm, +/- 1%, 100 mW, -55 to 155 degC, 0603 (1608 Metric), RoHS, Tape and Reel", Capacitance="1 mF", Case\Package=Radial, Max Operating Temperature="85 degC", Min Operating Temperature="-40 degC", Package Quantity=200, Resistance=1MR, Tolerance=20%, Voltage Rating="25 V", ComponentLink1Description="Manufacturer URL", ComponentLink1URL=http://www.yageo.com/, ComponentLink2Description=Datasheet, ComponentLink2URL=http://www.yageo.com/documents/recent/PYu-RC_Group_51_RoHS_L_04.pdf, DatasheetVersion="Rev. 4, 02/2016", Diameter="10 mm", Height="20 mm", Lead Pitch="5 mm", Length="20 mm", Mount="Through Hole", PackageDescription="2-Pin Surface Mount Device, Body 1.6 x 0.8 mm", PackageReference=0603, Packaging=Bulk, Radiation Hardening=No, REACH SVHC="No SVHC", RoHSCompliant=true, Voltage Rating (DC)="25 V", Width="0 inch"
R13: library part CMP-2100-03662-2, "RES SMD 100K OHM 1% 1/10W 0603", Case Code (Imperial)=0603, Case Code (Metric)=1608, Max Operating Temperature=155°C, Max Power Dissipation=100mW, Min Operating Temperature=-55°C, Resistance=100kR, Resistance Tolerance=1%, Resistor Type="Thick Film", Temperature Coefficient=100ppm/°C, Voltage Rating=50V, Working Voltage=75V, Case/Package=0603, Construction=Rectangular, Depth=0.8mm, Features="Moisture Resistant", Height=0.45mm, Lead Free="Lead Free", Length=1.6mm, Military Standard=Not, Number of Pins=2, Number of Terminations=2, Packaging="Tape and Reel", Power Rating=100mW, REACH SVHC="No SVHC", RoHS Compliant=Yes, Series=RC, Technology="THICK FILM", Termination=SMD/SMT, Tolerance=1%, Voltage Rating (DC)=50V, Width=0.8mm
SW2: library part CMP-10038-000001-1, "SWITCH SLIDE SPDT 300MA 6V", Contact Current Rating=300mA, Contact Resistance=70mΩ, Manufacturer=C&K, Temperature="-40°C to +85°C", Temperature Range High=+85°C, Temperature Range Low=-40°C, Voltage Rating Dc=6V, Automotive=No, Category=Switch, ComponentLink2Description=Datasheet, ComponentLink2URL=https://www.ckswitches.com/media/1422/js.pdf, Device Class L1=Electromechanical, Device Class L2=Switches, Device Class L3="Slide Switches", Digikey Description="SWITCH SLIDE SPDT 300MA 6V", Electromechanical Life=5000Cycles, Height=3.5mm, Lead Free=Yes, Manufacturer Part Number=JS102011JAQN, Mount="Surface Mount", Mouser Description="JS Series Sub-Miniature Slide Switch SPDT Right-Angle SMT", Octopart=https://octopart.com/js102011jaqn-c%26k+components-74831566, Package=JS102011JAQN, RoHS=TRUE, Throw Configuration=SPDT
U1: "With internal PCB antenna, 10.0 x 15.0 x 2.2 mm, use with open CPU", Package="SMD-55 u-blox", Availability=Unavailable, MF=u-blox, MP=NINA-B306-00B-00, Price=None, SnapEDA_Link=https://www.snapeda.com/parts/NINA-B306-00B-00/u-blox/view-part/4176731/?ref=snap
U2: library part CMP-04917-000026-1, "IC REG LINEAR 3.3V 200MA SOT23-5", Dropout Voltage=120mV, Manufacturer="Texas Instruments", Max Junction Temp=+125°C, Max Supply Voltage=5.5V, Min Supply Voltage=2.7V, Nominal Supply Current=170uA, Output Current=200mA, Output Voltage=3.3V, Package=DBV0005A, Temperature="-40°C to +125°C", Temperature Range Low=-40°C, Accuracy Percentage=2%, Automotive=No, Category=IC, ComponentLink2Description=Datasheet, ComponentLink2URL=http://www.ti.com/lit/ds/symlink/tps730.pdf, Device Class L1="Integrated Circuits (ICs)", Device Class L2="Power Management ICs", Device Class L3="Voltage Regulators - Linear", Digikey Description="IC REG LINEAR 3.3V 200MA SOT23-5", Height=1.45mm, Lead Free=Yes, Manufacturer Part Number=TPS73033DBVR, Mouser Description="IC REG LINEAR 3.3V 200MA SOT23-5", Number Of Outputs=1, Octopart=https://octopart.com/tps73033dbvr-texas+instruments-525554, Output Type=Fixed, RoHS=TRUE, Standoff Height=0mm, Temperature Range High=+125°C
U3: "4 Mbit, 3.0V (2.7V to 3.6V), -40C to 85C, SOIC-W 208mil (Tape & Reel), Single, Dual, Quad SPI NOR flash", Package="SOIC-8 Dialog Semiconductor", Supplier Part Number 1=1265-AT25SF041B-SHB-TCT-ND, Availability=Warning, Check_prices=https://www.snapeda.com/parts/AT25SF041B-SHB-T/Dialog%20Semiconductor/view-part/5488498/?ref=eda, MF="Dialog Semiconductor", MP=AT25SF041B-SHB-T, Price=None, Purchase-URL=https://pricing.snapeda.com/search/part/AT25SF041B-SHB-T/?ref=eda, SnapEDA_Link=https://www.snapeda.com/parts/AT25SF041B-SHB-T/Dialog%20Semiconductor/view-part/5488498/?ref=snap, Supplier 1=Digi-Key
U4: "Optical Sensor Ambient 610nm, 680nm, 730nm, 760nm, 810nm, 860nm IÂ²C, SPI 20-BFLGA", Package="LGA-20 ams", Availability=Unavailable, MF=ams, MP=AS7263-BLGT, Price=None, SnapEDA_Link=https://www.snapeda.com/parts/AS7263-BLGT/ams/view-part/1600359/?ref=snap
U6: library part CMP-0133-00144-2, "IC CONTROLLR LI-ION 4.2V SOT23-5", Case/Package=SOT-23, Max Charge Current=500mA, Max Operating Temperature=85°C, Max Output Voltage=4.232V, Max Supply Voltage=6V, Min Operating Temperature=-40°C, Min Output Voltage=4.168V, Min Supply Voltage=3.75V, Output Voltage=4.2V, Package Quantity=3000, Height=1.3mm, Lead Free="Lead Free", Length=3.1mm, Max Output Current=500mA, Mount="Surface Mount", Number of Cells=1, Number of Pins=5, Output Current=500mA, Packaging="Tape and Reel", REACH SVHC="No SVHC", Width=1.8mm

## Free pads (board coordinates)
  round 1.524 smd far side: 1(-11.303,11.024) 1(-11.303,13.513) ""(-11.303,15.799)
  round 1.524 smd: 1(-9.754,9.779) 2(-12.522,9.677) 3(-10.871,7.137) 5(8.407,4.648) 6(9.957,6.909)
  rect 0.4x1.4 smd: 1(1.23,28.26) 2(0.58,28.26) 3(-0.07,28.26) 4(-0.72,28.26) 5(-1.37,28.26)
  rect 0.1x0.1 smd paste-1 mask+0: 6(3.8,30.18) 7(-3.58,30.09)
  rect 1.9x2 smd: 8(1.13,30.81) 9(-1.27,30.81)
  round 0.45 hole 0.45 unplated: ""(-3.645,30.81) ""(3.505,30.81)

## Via types
v1: diameter 0.6, hole 0.3, Top Layer to Bottom Layer, 26 vias
v2: diameter 1.27, hole 0.711, Top Layer to Bottom Layer, 4 vias

## Nets (pads, with @x,y where several pads share a name; then routed paths per layer and width w, separated by ;. In a path a pad name is that pad's centre, name@x,y a point inside that pad or via, vN(x,y) a via of type N, cw(c..) or ccw(c..) an arc to the next point about the centre after c; other vN are vias at no path point)
3.3V: C2.2 C3.2 C5.1 C6.1 C7.1 C8.2 D1.4 D3.1 D4.2 pad.1@-9.754,9.779 R1.2 R5.2 R6.1 R10.2 R11.2 U1.9 U1.10 U2.5 U3.3 U3.7 U3.8 U4.14 U4.17 | length 63.1
  Top Layer w0.152: R1.2 6.719,5.918 v1(8.001,5.918)
  Top Layer w0.254: C5.1 C5.1@-11.428,14.618 ; U2.5@-9.811,14.618 U2.5 ; v1(-5.537,7.544) -6.452,7.544 C2.2 C2.2@-6.502,7.443 ; U1.10 -6.483,5.734 C3.2 C2.2@-6.502,7.443 ; U1.9 -5.793,6.734 C2.2@-6.502,7.443 ; v1(11.582,7.645) 11.649,7.712 11.649,8.111 12.207,8.669 D1.4
  Top Layer w0.4: v2(-12.681,14.554) -12.673,14.547 -11.513,14.547 C5.1 ; C5.1@-11.428,14.618 U2.5@-9.811,14.618
  Bottom Layer w0.152: U3.8@-4.457,17.49 -4.244,17.704 U3.8 ; U4.17 U4.17@2.305,21.204 ; D3.1 5.715,10.77 v1(6.172,10.312) ; U4.14@3.792,22.792 U4.14 ; C6.1 4.84,19.634 v1(6.045,19.634)
  Bottom Layer w0.2: v1(-5.766,12.598) -3.759,14.605 C8.2 ; v1(-5.766,13.665) -4.584,14.847 C7.1 ; C7.1@-4.559,15.767 -4.559,16.778 -4.457,16.881 U3.8@-4.457,17.49 ; v1(-2.261,27.28) R5.2 ; R6.1@-1.475,18.355 -1.825,18.705 R6.1 -1.88,17.59 -1.201,16.912 -1.201,14.739 C8.2 ; v1(-0.889,20.879) -0.823,20.813 -0.823,20.25 D4.2@-0.002,19.429 ; U4.17 2.301,17.987 0.614,16.301 0.459,16.301 -1.237,14.605 C8.2 ; U4.17@2.305,21.204 2.305,21.99 2.545,22.23 3.107,22.792 U4.14@3.792,22.792 ; R11.2 6.045,21.879 v1(6.045,19.634) ; R10.2 8.525,22.25 v1(10.16,22.25)
  Bottom Layer w0.254: U3.3 -10.416,20.244 -7.737,22.923 -7.737,23.429 v1(-7.671,23.495) ; U3.8 U3.7 ; D4.2 D4.2@-0.002,19.429 ; U4.14 3.949,22.843 4.411,22.843 4.801,22.453 C6.1@4.801,20.054
  other v1: -9.754,9.779
CS_EE: U3.1 U4.6 | length 19.4
  Bottom Layer w0.152: U3.1 -11.486,17.704 -12.002,18.22 -12.002,22.321 -8.263,26.06 0.247,26.06 0.351,25.957 U4.6
GND: C2.1 C3.1 C4.2 C5.2 C6.2 C7.2 C8.1 C9.1 C10.2 C11.1 C12.2 C14.2 J3.2 pad.5 R8.1 R12.1 R13.1 SW2.1 U1.6 U1.12 U1.14 U1.26 U1.30 U1.53 U1.EAGP1 U1.EAGP2 U1.EAGP3 U1.EAGP4 U1.EGP1 U1.EGP2 U1.EGP3 U1.EGP4 U1.EGP5 U1.EGP6 U1.EGP7 U1.EGP8 U1.EGP9 U1.EGP10 U1.EGP11 U1.EGP12 U2.2 U3.4 U4.16 U6.2 | length 37.2
  Top Layer w0.152: v2(-8.661,3.988) -8.661,5.006 C3.1 C2.1 ; C12.2 -6.062,9.178 v1(-5.563,9.677) -4.013,9.677 U1.6
  Top Layer w0.2: v1(-10.084,23.495) -10.084,23.526 -9.19,24.42 -8.89,24.42 SW2.1@-6.49,24.42
  Top Layer w0.4: U6.2 8.292,23.52 C11.1
  Top Layer w0.45: C9.1 -11.527,18.636 -10.615,17.724 -9.51,17.724 -8.808,17.022 -8.808,16.096 ; C5.2@-11.499,15.882 C5.2 -8.601,15.89 -8.358,15.646 U2.2 -7.058,15.721 -6.581,15.721 -4.086,18.217 -4.086,18.252 -3.919,18.419 C4.2@-3.846,18.419
  Bottom Layer w0.2: U3.4 -10.951,22.602 -10.084,23.47 v1(-10.084,23.495) ; C8.1@0.773,15.011 0.367,14.605 C8.1 0.268,15.46 2.951,18.142 U4.16
LB: R4.2 U1.22 | length 7
  Top Layer w0.152: U1.22 4.519,11.734 4.89,12.105 9.448,12.105 10.149,11.405 R4.2
LG: R3.2 U1.21 | length 3.7
  Top Layer w0.152: U1.21 4.567,11.008 5.8,11.008 6.174,11.382 7.479,11.382 7.442,11.345 7.442,11.252 7.48,11.29 R3.2
LR: R2.2 U1.20 | length 3.3
  Top Layer w0.152: U1.20 4.452,9.576 R2.2
MISO: pad.@-11.303,15.799 U3.2 U4.5 | length 17
  Bottom Layer w0.152: pad.@-11.303,15.799 -9.9,17.202 -9.9,18.458 U3.2@-10.416,18.974 ; U3.2 U3.2@-10.416,18.974 ; U4.5@-0.324,24.846 -2.377,24.846 -8.249,18.974 U3.2@-10.416,18.974
MOSI: pad.1@-11.303,13.513 U3.5 U4.4 | length 15.9
  Bottom Layer w0.152: pad.1@-11.303,13.513 -7.014,17.802 -7.014,18.816 -4.316,21.514 U3.5 -3.318,21.514 -3.105,21.728 -3.105,22.076 -1.228,23.952 -1.208,23.952 -0.964,24.196 U4.4
NetC4_1: C4.1 D7.1 Q1.4 R9.1 SW2.3 U2.1 | length 19.8
  Top Layer w0.152: SW2.3@-8.89,19.42 -6.49,19.42 -4.418,19.42 -3.911,19.927 C4.1 -3.861,21.657 D7.1
  Top Layer w0.4: U2.1 -6.132,14.696 -5.055,15.773 -5.055,16.397 -3.875,17.577 -2.876,17.577 -2.642,17.811 -2.642,18.591 -1.588,19.644 -1.54,19.644 Q1.4@-1.235,19.949 ; D7.1 -2.702,21.708 -1.33,20.336 -1.33,20.044 Q1.4@-1.235,19.949 ; Q1.4 Q1.4@-1.235,19.949
NetC9_2: C9.2 U2.4 | length 2
  Top Layer w0.152: C9.2 -11.527,17.076 -11.048,16.596 U2.4
NetC12_1: C12.1 FB1.2 U1.31 | length 7.4
  Top Layer w0.45: C12.1 -7.214,10.457 -7.214,11.568 FB1.2 -5.78,11.593 v1(-5.76,11.613) ; v1(-2.87,14.046) -2.87,14.006 -2.706,13.842 -2.706,13.409 U1.31
  Bottom Layer w0.45: v1(-5.76,11.613) -5.303,11.613 v1(-2.87,14.046)
NetC14_1: C14.1 D5.1 pad.6@3.8,30.18 pad.7 pad.8 pad.9 R12.2 | length 16
  Top Layer w0.152: pad.7 -3.262,29.772 R12.2 -3.17,26.279 C14.1@-1.599,26.279 ; -3.194,30.81 pad.9 pad.8 3.054,30.81 ; C14.1 C14.1@-1.599,26.279 ; D5.1 -0.771,23.506 -1.045,23.78 -1.369,23.78 -2.2,24.611 -2.2,25.678 C14.1@-1.599,26.279
NetD1_1: D1.1 R2.1 | length 2.1
  Top Layer w0.152: R2.1 9.699,9.576 10.607,8.669 D1.1
NetD1_2: D1.2 R3.1 | length 2.6
  Top Layer w0.152: R3.1 8.98,11.254 10.408,9.826 10.408,9.767 10.607,9.569 D1.2
NetD1_3: D1.3 R4.1 | length 1.8
  Top Layer w0.152: D1.3 R4.1
NetD2_1: D2.1 U6.1 | length 2
  Top Layer w0.152: D2.1 6.669,22.378 6.861,22.57 U6.1
NetD2_2: D2.2 R7.1 | length 5.8
  Top Layer w0.2: D2.2 5.219,21.826 5.984,22.591 5.984,24.819 7.024,25.859 R7.1
NetD3_2: D3.2 U4.15 | length 12.3
  Bottom Layer w0.3: D3.2@1.765,10.783 1.765,10.77 1.778,10.783 1.778,15.723 3.626,17.571 U4.15@3.626,22.246
NetD4_1: D4.1 U4.18 | length 2.1
  Bottom Layer w0.2: D4.1 1.499,19.329 1.549,19.279 1.648,19.377 1.648,20.188 1.651,20.192 U4.18
NetD6_1: D6.1 R9.2
NetR5_1: R5.1 U4.8 | length 1.4
  Bottom Layer w0.152: R5.1 1.651,27.268 U4.8
NetR6_2: R6.2 U4.2 | length 3.6
  Bottom Layer w0.152: R6.2 -1.88,22.001 -1.088,22.792 -0.698,22.792 U4.2
NetR8_2: R8.2 U6.5 | length 1.8
  Top Layer w0.152: R8.2 4.19,22.031 4.729,22.57 U6.5
NetSW2_2: SW2.2 U2.3 | length 7.2
  Top Layer w0.152: SW2.2@-8.89,21.92 -8.89,21.04 -9.916,20.014 -9.916,18.827 -8.913,17.823 -8.61,17.823 -7.423,16.637 -7.173,16.637 U2.3
RESETN: pad.6@9.957,6.909 R1.1 U1.19 | length 6.4
  Top Layer w0.152: U1.19 5.149,8.734 6.58,7.304 R1.1 7.029,6.93 9.936,6.93 pad.6@9.957,6.909
SCK: pad.1@-11.303,11.024 U3.6 U4.3 | length 17.8
  Bottom Layer w0.152: pad.1@-11.303,11.024 -11.303,12.115 -6.711,16.707 -6.711,17.848 -4.316,20.244 U3.6 -3.246,20.244 -2.182,21.308 -2.182,22.348 -1.228,23.302 -1.208,23.302 -0.964,23.546 U4.3
SCL: R10.1 U1.47 U4.11 | length 14.8
  Top Layer w0.152: U1.47 4.33,15.723 v1(5.063,15.723)
  Bottom Layer w0.152: U4.11 6.714,24.846 8.179,23.381 R10.1 8.179,23.335 7.493,22.65 7.493,18.136 5.08,15.723 v1(5.063,15.723)
SDA: R11.1 U1.48 U4.12 | length 12.1
  Top Layer w0.152: U1.48 3.522,16.237 3.522,16.266 4.096,16.84 v1(4.686,16.84)
  Bottom Layer w0.152: U4.12 5.205,24.196 6.02,23.381 R11.1 6.02,23.335 6.702,22.653 6.702,18.856 v1(4.686,16.84)
SWCLK: pad.3@-10.871,7.137 U1.11 | length 11
  Top Layer w0.152: pad.3@-10.871,7.137 -10.82,7.087 -10.82,5.664 v1(-10.77,5.613) ; v1(-2.692,5.74) -1.9,5.74 U1.11
  Bottom Layer w0.152: v1(-10.77,5.613) -10.312,5.156 -3.277,5.156 v1(-2.692,5.74)
SWDIO: pad.2@-12.522,9.677 U1.15 | length 16.5
  Top Layer w0.152: pad.2@-12.522,9.677 -12.471,9.677 -11.659,8.865 v1(-11.608,8.865) ; v1(2.057,6.477) 2.057,5.92 U1.15
  Bottom Layer w0.152: v1@-11.586,8.89 -8.625,6.401 1.981,6.401 v1(2.057,6.477)
USB_N: D5.3 pad.2@0.58,28.26 U1.55 | length 0.8
  Top Layer w0.152: U1.55@-3.835,15.884 U1.55 ; v1(-1.751,16.684) v1@-1.658,16.716 ; 0.58,21.656 D5.3
  other v1: -3.429,16.713
USB_P: D5.2 pad.3@-0.07,28.26 U1.54 | length 0.7
  Top Layer w0.152: D5.2 -0.07,21.656
VBAT: C11.2 D6.2 J3.1 Q1.1 Q1.2 Q1.5 Q1.6 U6.3 | length 11.5
  Top Layer w0.3: v1(-0.925,18.049) Q1.5
  Top Layer w0.4: U6.3 7.122,24.46 8.752,24.46 C11.2 9.463,23.749 9.463,22.364 8.843,21.744 8.843,18.699 8.543,18.399 J3.1
  Bottom Layer w0.3: v1@-0.91,18.034 -0.884,18.009 v1(1.168,18.009)
VBUS: C10.1 D5.4 D7.2 FB1.1 pad.1@1.23,28.26 Q1.3 R7.2 R13.2 U6.4 | length 54.9
  Top Layer w0.2: U6.4@5.205,24.47 5.524,24.789 R7.2
  Top Layer w0.45: FB1.1 -7.213,12.943 -7.414,13.144 R13.2 -10.799,13.144 -11.048,12.895 -12.647,12.895 -13.691,13.939 -13.691,18.95 -9.821,22.82 -6.26,22.82 -5.315,23.765 -5.315,25.554 -5.237,25.632 ; v2(-5.151,27.351) -5.237,27.266 -5.237,25.632 ; D7.2 -4.142,25.208 -4.812,25.208 -5.237,25.632 ; D5.4 1.279,23.556 1.954,22.881 1.954,21.201 1.585,20.832 Q1.3 ; D5.4 pad.1@1.229,28.259 ; pad.1@1.23,28.26 3.058,28.26 v2(4.089,27.229) 4.089,25.134 4.753,24.47 U6.4 U6.4@5.205,24.47
  Bottom Layer w0.45: v2@-5.156,27.356 -4.332,28.18 3.012,28.18 3.962,27.229 v2(4.089,27.229)
pads on no net: J3.MP1 J3.MP2 SW2. U1.1 U1.2 U1.3 U1.4 U1.5 U1.7 U1.8 U1.13 U1.16 U1.17 U1.18 U1.23 U1.24 U1.25 U1.27 U1.28 U1.29 U1.32 U1.33 U1.34 U1.35 U1.36 U1.37 U1.38 U1.39 U1.40 U1.41 U1.42 U1.43 U1.44 U1.45 U1.46 U1.49 U1.50 U1.51 U1.52 U4.1 U4.7 U4.9 U4.10 U4.13 U4.19 U4.20

## Polygon pours and split planes (outlines as drawn)
GND on Top Layer "NONET_L01_P006" (solid, remove dead copper, shelved, pour order 6): -15.025,14.986 ccw(c-0.025,14.986) -0.025,-0.014 ccw(c-0.025,14.986) 14.975,14.986 ccw(c-0.025,14.986) -0.025,29.986 ccw(c-0.025,14.986)
no net on Top Layer "NONET_L01_P005" (none, shelved, pour order 5): -4.95,29.289 ccw(c-0.025,14.986) 15.102,14.986 ccw(c-0.025,14.986) 4.9,29.289 ccw(c4.858,29.169) 4.817,29.048 cw(c-0.025,14.986) 14.847,14.986 cw(c-0.025,14.986) -4.867,29.048 ccw(c-4.909,29.169) -4.782,29.169 ccw(c-4.909,29.169)
GND on Top Layer "NONET_L01_P001" (solid, shelved, pour order 1): -4.674,1.829 -4.724,1.778 -4.699,1.753 5.004,1.753 5.004,14.021 4.877,14.148 -4.674,14.148
VBAT on Top Layer "NONET_L01_P002" (solid, shelved, pour order 2): 5.918,18.923 5.537,19.304 1.016,19.304 1.016,17.78 1.067,17.729 5.715,17.729 5.944,17.958
GND on GND "NONET_L02_P007" (solid, remove dead copper, shelved, pour order 7): -15.032,14.976 ccw(c-0.032,14.976) -0.032,-0.024 ccw(c-0.032,14.976) 14.968,14.976 ccw(c-0.032,14.976) -0.032,29.976 ccw(c-0.032,14.976)
GND on Bottom Layer "NONET_L04_P008" (solid, remove dead copper, shelved, pour order 8): -15.032,14.976 ccw(c-0.032,14.976) -0.032,-0.024 ccw(c-0.032,14.976) 14.968,14.976 ccw(c-0.032,14.976) -0.032,29.976 ccw(c-0.032,14.976)
3.3V on 3.3V "NONET_L03_P004" (solid, remove dead copper, shelved, pour order 4): -15.032,14.976 ccw(c-0.032,14.976) -0.032,-0.024 ccw(c-0.032,14.976) 14.968,14.976 ccw(c-0.032,14.976) -0.032,29.976 ccw(c-0.032,14.976)

## Keep-outs
Keep-Out Layer:
  lines w0.127: -5.138,32.194 ccw(c-5.004,32.058) -5.138,32.194 ; -4.991,32.342 cw(c-4.855,32.207) -4.99,32.342 ; 4.965,32.342 ccw(c4.83,32.207) 4.965,32.342 ; 5.113,32.194 cw(c4.978,32.058) 5.113,32.194 ; -5.139,32.193 ccw(c-5.004,32.058) -5.195,32.058 -5.195,29.312 ccw(c-5.004,29.312) -5.191,29.272 ccw(c-0.025,14.986) 15.166,14.986 ccw(c-0.025,14.986) 5.169,29.261 5.169,32.058 ccw(c4.978,32.058) 5.113,32.193 ; -5.138,32.194 ccw(c-5.004,32.058) -5.139,32.193 ; -5.138,32.194 ccw(c-5.004,32.058) -5.138,32.194 ; -5.138,32.194 -4.99,32.342 ; -5.139,32.193 -5.138,32.194 ; -5.139,32.193 -5.138,32.194 ; -4.99,32.342 ccw(c-4.855,32.207) -4.99,32.342 ; -4.99,32.342 ccw(c-4.855,32.207) -4.99,32.342 ; -4.99,32.342 cw(c-4.855,32.207) -4.855,32.398 4.83,32.398 cw(c4.83,32.207) 4.965,32.342 ; -4.99,32.342 -4.99,32.342 ; -4.99,32.342 -4.99,32.342 ; 4.965,32.342 ccw(c4.83,32.207) 4.965,32.342 ; 4.965,32.342 ccw(c4.83,32.207) 4.965,32.342 ; 4.965,32.342 4.965,32.342 ; 4.965,32.342 4.965,32.342 ; 4.965,32.342 5.113,32.194 ; 5.113,32.194 ccw(c4.978,32.058) 5.113,32.194 ; 5.113,32.193 ccw(c4.978,32.058) 5.113,32.194 ; 5.113,32.194 5.113,32.193 ; 5.113,32.194 5.113,32.193

## Other copper
Top Layer:
  pour cut-out: -3.835,1.835 -3.835,4.935 4.191,4.935 4.191,1.835
  region net NetC14_1: 3.478,29.886 3.45,29.888 3.423,29.892 3.396,29.897 3.369,29.903 3.343,29.911 3.317,29.92 3.292,29.931 3.267,29.942 3.243,29.956 3.219,29.97 3.197,29.985 3.175,30.002 3.154,30.02 3.134,30.039 3.115,30.059 3.097,30.08 3.08,30.102 3.065,30.124 3.051,30.148 3.037,30.172 3.026,30.197 3.015,30.222 3.006,30.248 2.998,30.274 2.992,30.301 2.987,30.328 2.983,30.355 2.981,30.383 2.98,30.41 2.98,30.81 3.28,30.81 3.28,30.41 3.281,30.398 3.281,30.387 3.283,30.375 3.285,30.363 3.288,30.352 3.291,30.341 3.295,30.33 3.3,30.319 3.305,30.308 3.31,30.298 3.317,30.288 3.323,30.278 3.33,30.269 3.338,30.26 3.346,30.251 3.355,30.243 3.364,30.235 3.373,30.228 3.383,30.221 3.393,30.215 3.403,30.21 3.414,30.205 3.425,30.2 3.436,30.196 3.447,30.193 3.458,30.19 3.47,30.188 3.482,30.186 3.493,30.186 3.505,30.185 3.517,30.186 3.529,30.186 3.54,30.188 3.552,30.19 3.563,30.193 3.575,30.196 3.586,30.2 3.597,30.205 3.607,30.21 3.618,30.215 3.628,30.221 3.637,30.228 3.647,30.235 3.656,30.243 3.664,30.251 3.672,30.26 3.68,30.269 3.687,30.278 3.694,30.288 3.7,30.298 3.706,30.308 3.711,30.319 3.715,30.33 3.719,30.341 3.723,30.352 3.725,30.363 3.727,30.375 3.729,30.387 3.73,30.398 3.73,30.41 3.73,30.81 4.03,30.81 4.03,30.41 4.029,30.383 4.027,30.355 4.024,30.328 4.019,30.301 4.012,30.274 4.005,30.248 3.995,30.222 3.985,30.197 3.973,30.172 3.96,30.148 3.946,30.124 3.93,30.102 3.913,30.08 3.895,30.059 3.876,30.039 3.856,30.02 3.836,30.002 3.814,29.985 3.791,29.97 3.768,29.956 3.744,29.942 3.719,29.931 3.693,29.92 3.667,29.911 3.641,29.903 3.614,29.897 3.587,29.892 3.56,29.888 3.533,29.886 3.505,29.885
  region net NetC14_1: 2.98,31.21 2.981,31.238 2.983,31.265 2.987,31.292 2.992,31.319 2.998,31.346 3.006,31.372 3.015,31.398 3.026,31.424 3.037,31.449 3.051,31.473 3.065,31.496 3.08,31.519 3.097,31.541 3.115,31.561 3.134,31.581 3.154,31.6 3.175,31.618 3.197,31.635 3.219,31.651 3.243,31.665 3.267,31.678 3.292,31.69 3.317,31.7 3.343,31.71 3.369,31.717 3.396,31.724 3.423,31.729 3.45,31.732 3.478,31.734 3.505,31.735 3.533,31.734 3.56,31.732 3.587,31.729 3.614,31.724 3.641,31.717 3.667,31.71 3.693,31.7 3.719,31.69 3.744,31.678 3.768,31.665 3.791,31.651 3.814,31.635 3.836,31.618 3.856,31.6 3.876,31.581 3.895,31.561 3.913,31.541 3.93,31.519 3.946,31.496 3.96,31.473 3.973,31.449 3.985,31.424 3.995,31.398 4.005,31.372 4.012,31.346 4.019,31.319 4.024,31.292 4.027,31.265 4.029,31.238 4.03,31.21 4.03,30.81 3.73,30.81 3.73,31.21 3.73,31.222 3.729,31.234 3.727,31.245 3.725,31.257 3.723,31.268 3.719,31.28 3.715,31.291 3.711,31.302 3.706,31.312 3.7,31.323 3.694,31.333 3.687,31.342 3.68,31.352 3.672,31.361 3.664,31.369 3.656,31.377 3.647,31.385 3.637,31.392 3.628,31.399 3.618,31.405 3.607,31.411 3.597,31.416 3.586,31.42 3.575,31.424 3.563,31.428 3.552,31.43 3.54,31.432 3.529,31.434 3.517,31.435 3.505,31.435 3.493,31.435 3.482,31.434 3.47,31.432 3.458,31.43 3.447,31.428 3.436,31.424 3.425,31.42 3.414,31.416 3.403,31.411 3.393,31.405 3.383,31.399 3.373,31.392 3.364,31.385 3.355,31.377 3.346,31.369 3.338,31.361 3.33,31.352 3.323,31.342 3.317,31.333 3.31,31.323 3.305,31.312 3.3,31.302 3.295,31.291 3.291,31.28 3.288,31.268 3.285,31.257 3.283,31.245 3.281,31.234 3.281,31.222 3.28,31.21 3.28,30.81 2.98,30.81
  region net NetC14_1: -3.672,29.886 -3.7,29.888 -3.727,29.892 -3.754,29.897 -3.781,29.903 -3.807,29.911 -3.833,29.92 -3.858,29.931 -3.883,29.942 -3.907,29.956 -3.931,29.97 -3.953,29.985 -3.975,30.002 -3.996,30.02 -4.016,30.039 -4.035,30.059 -4.053,30.08 -4.07,30.102 -4.085,30.124 -4.099,30.148 -4.113,30.172 -4.124,30.197 -4.135,30.222 -4.144,30.248 -4.152,30.274 -4.158,30.301 -4.163,30.328 -4.167,30.355 -4.169,30.383 -4.17,30.41 -4.17,30.81 -3.87,30.81 -3.87,30.41 -3.869,30.398 -3.869,30.387 -3.867,30.375 -3.865,30.363 -3.862,30.352 -3.859,30.341 -3.855,30.33 -3.85,30.319 -3.845,30.308 -3.84,30.298 -3.834,30.288 -3.827,30.278 -3.82,30.269 -3.812,30.26 -3.804,30.251 -3.795,30.243 -3.786,30.235 -3.777,30.228 -3.767,30.221 -3.757,30.215 -3.747,30.21 -3.736,30.205 -3.725,30.2 -3.714,30.196 -3.703,30.193 -3.692,30.19 -3.68,30.188 -3.668,30.186 -3.657,30.186 -3.645,30.185 -3.633,30.186 -3.621,30.186 -3.61,30.188 -3.598,30.19 -3.587,30.193 -3.575,30.196 -3.564,30.2 -3.553,30.205 -3.543,30.21 -3.532,30.215 -3.522,30.221 -3.513,30.228 -3.503,30.235 -3.494,30.243 -3.486,30.251 -3.478,30.26 -3.47,30.269 -3.463,30.278 -3.456,30.288 -3.45,30.298 -3.444,30.308 -3.439,30.319 -3.435,30.33 -3.431,30.341 -3.427,30.352 -3.425,30.363 -3.423,30.375 -3.421,30.387 -3.42,30.398 -3.42,30.41 -3.42,30.81 -3.12,30.81 -3.12,30.41 -3.121,30.383 -3.123,30.355 -3.126,30.328 -3.131,30.301 -3.138,30.274 -3.145,30.248 -3.155,30.222 -3.165,30.197 -3.177,30.172 -3.19,30.148 -3.204,30.124 -3.22,30.102 -3.237,30.08 -3.255,30.059 -3.274,30.039 -3.294,30.02 -3.314,30.002 -3.336,29.985 -3.359,29.97 -3.382,29.956 -3.406,29.942 -3.431,29.931 -3.457,29.92 -3.483,29.911 -3.509,29.903 -3.536,29.897 -3.563,29.892 -3.59,29.888 -3.617,29.886 -3.645,29.885
  region net NetC14_1: -4.17,31.21 -4.169,31.238 -4.167,31.265 -4.163,31.292 -4.158,31.319 -4.152,31.346 -4.144,31.372 -4.135,31.398 -4.124,31.424 -4.113,31.449 -4.099,31.473 -4.085,31.496 -4.07,31.519 -4.053,31.541 -4.035,31.561 -4.016,31.581 -3.996,31.6 -3.975,31.618 -3.953,31.635 -3.931,31.651 -3.907,31.665 -3.883,31.678 -3.858,31.69 -3.833,31.7 -3.807,31.71 -3.781,31.717 -3.754,31.724 -3.727,31.729 -3.7,31.732 -3.672,31.734 -3.645,31.735 -3.617,31.734 -3.59,31.732 -3.563,31.729 -3.536,31.724 -3.509,31.717 -3.483,31.71 -3.457,31.7 -3.431,31.69 -3.406,31.678 -3.382,31.665 -3.359,31.651 -3.336,31.635 -3.314,31.618 -3.294,31.6 -3.274,31.581 -3.255,31.561 -3.237,31.541 -3.22,31.519 -3.204,31.496 -3.19,31.473 -3.177,31.449 -3.165,31.424 -3.155,31.398 -3.145,31.372 -3.138,31.346 -3.131,31.319 -3.126,31.292 -3.123,31.265 -3.121,31.238 -3.12,31.21 -3.12,30.81 -3.42,30.81 -3.42,31.21 -3.42,31.222 -3.421,31.234 -3.423,31.245 -3.425,31.257 -3.427,31.268 -3.431,31.28 -3.435,31.291 -3.439,31.302 -3.444,31.312 -3.45,31.323 -3.456,31.333 -3.463,31.342 -3.47,31.352 -3.478,31.361 -3.486,31.369 -3.494,31.377 -3.503,31.385 -3.513,31.392 -3.522,31.399 -3.532,31.405 -3.543,31.411 -3.553,31.416 -3.564,31.42 -3.575,31.424 -3.587,31.428 -3.598,31.43 -3.61,31.432 -3.621,31.434 -3.633,31.435 -3.645,31.435 -3.657,31.435 -3.668,31.434 -3.68,31.432 -3.692,31.43 -3.703,31.428 -3.714,31.424 -3.725,31.42 -3.736,31.416 -3.747,31.411 -3.757,31.405 -3.767,31.399 -3.777,31.392 -3.786,31.385 -3.795,31.377 -3.804,31.369 -3.812,31.361 -3.82,31.352 -3.827,31.342 -3.834,31.333 -3.84,31.323 -3.845,31.312 -3.85,31.302 -3.855,31.291 -3.859,31.28 -3.862,31.268 -3.865,31.257 -3.867,31.245 -3.869,31.234 -3.869,31.222 -3.87,31.21 -3.87,30.81 -4.17,30.81
Bottom Layer: